# EAGLE board PP-Rev1 (EAGLE 7.1.0)
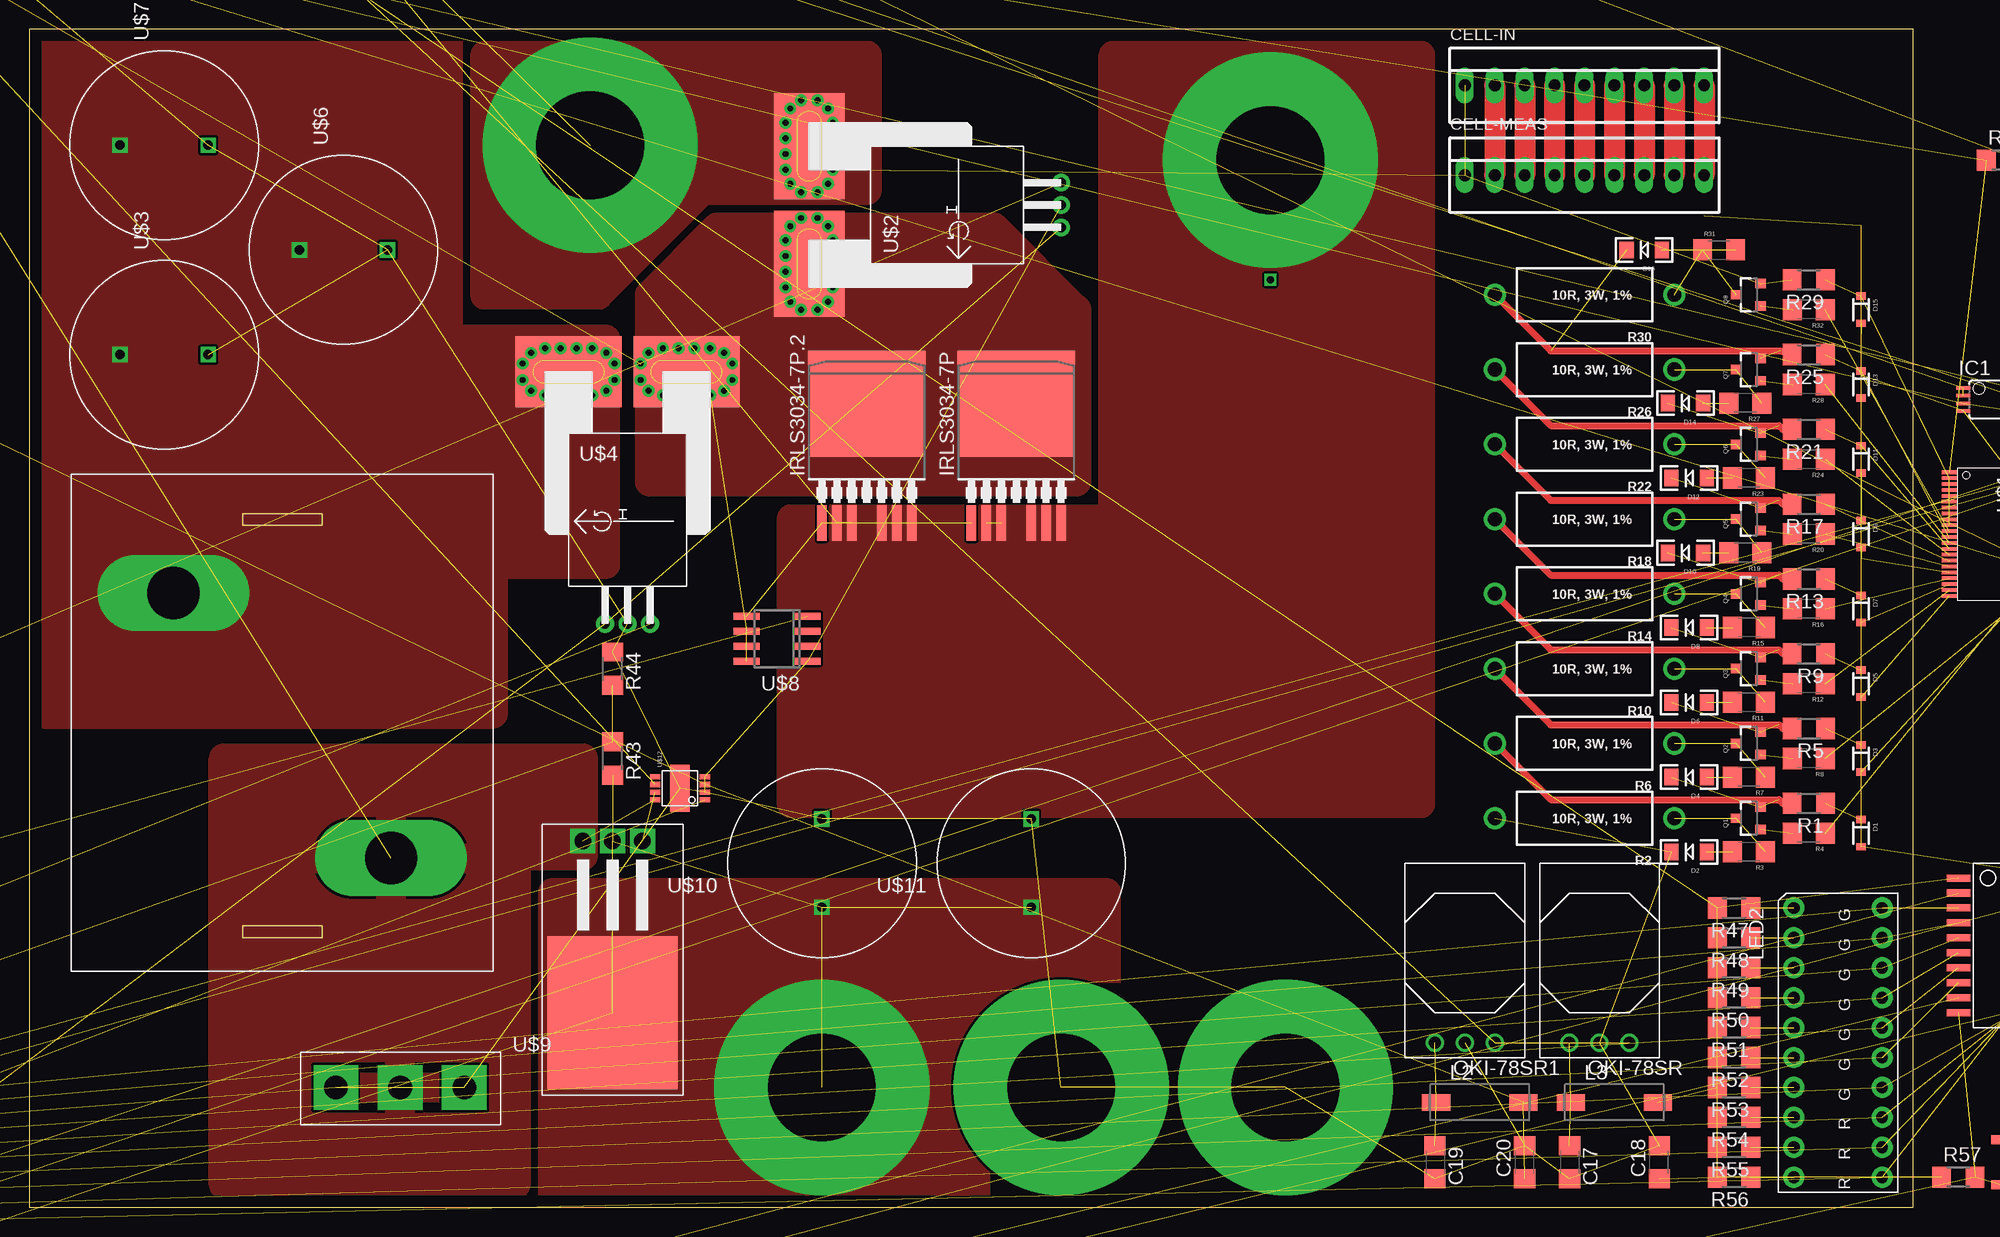
[diagram p0: board, top side]
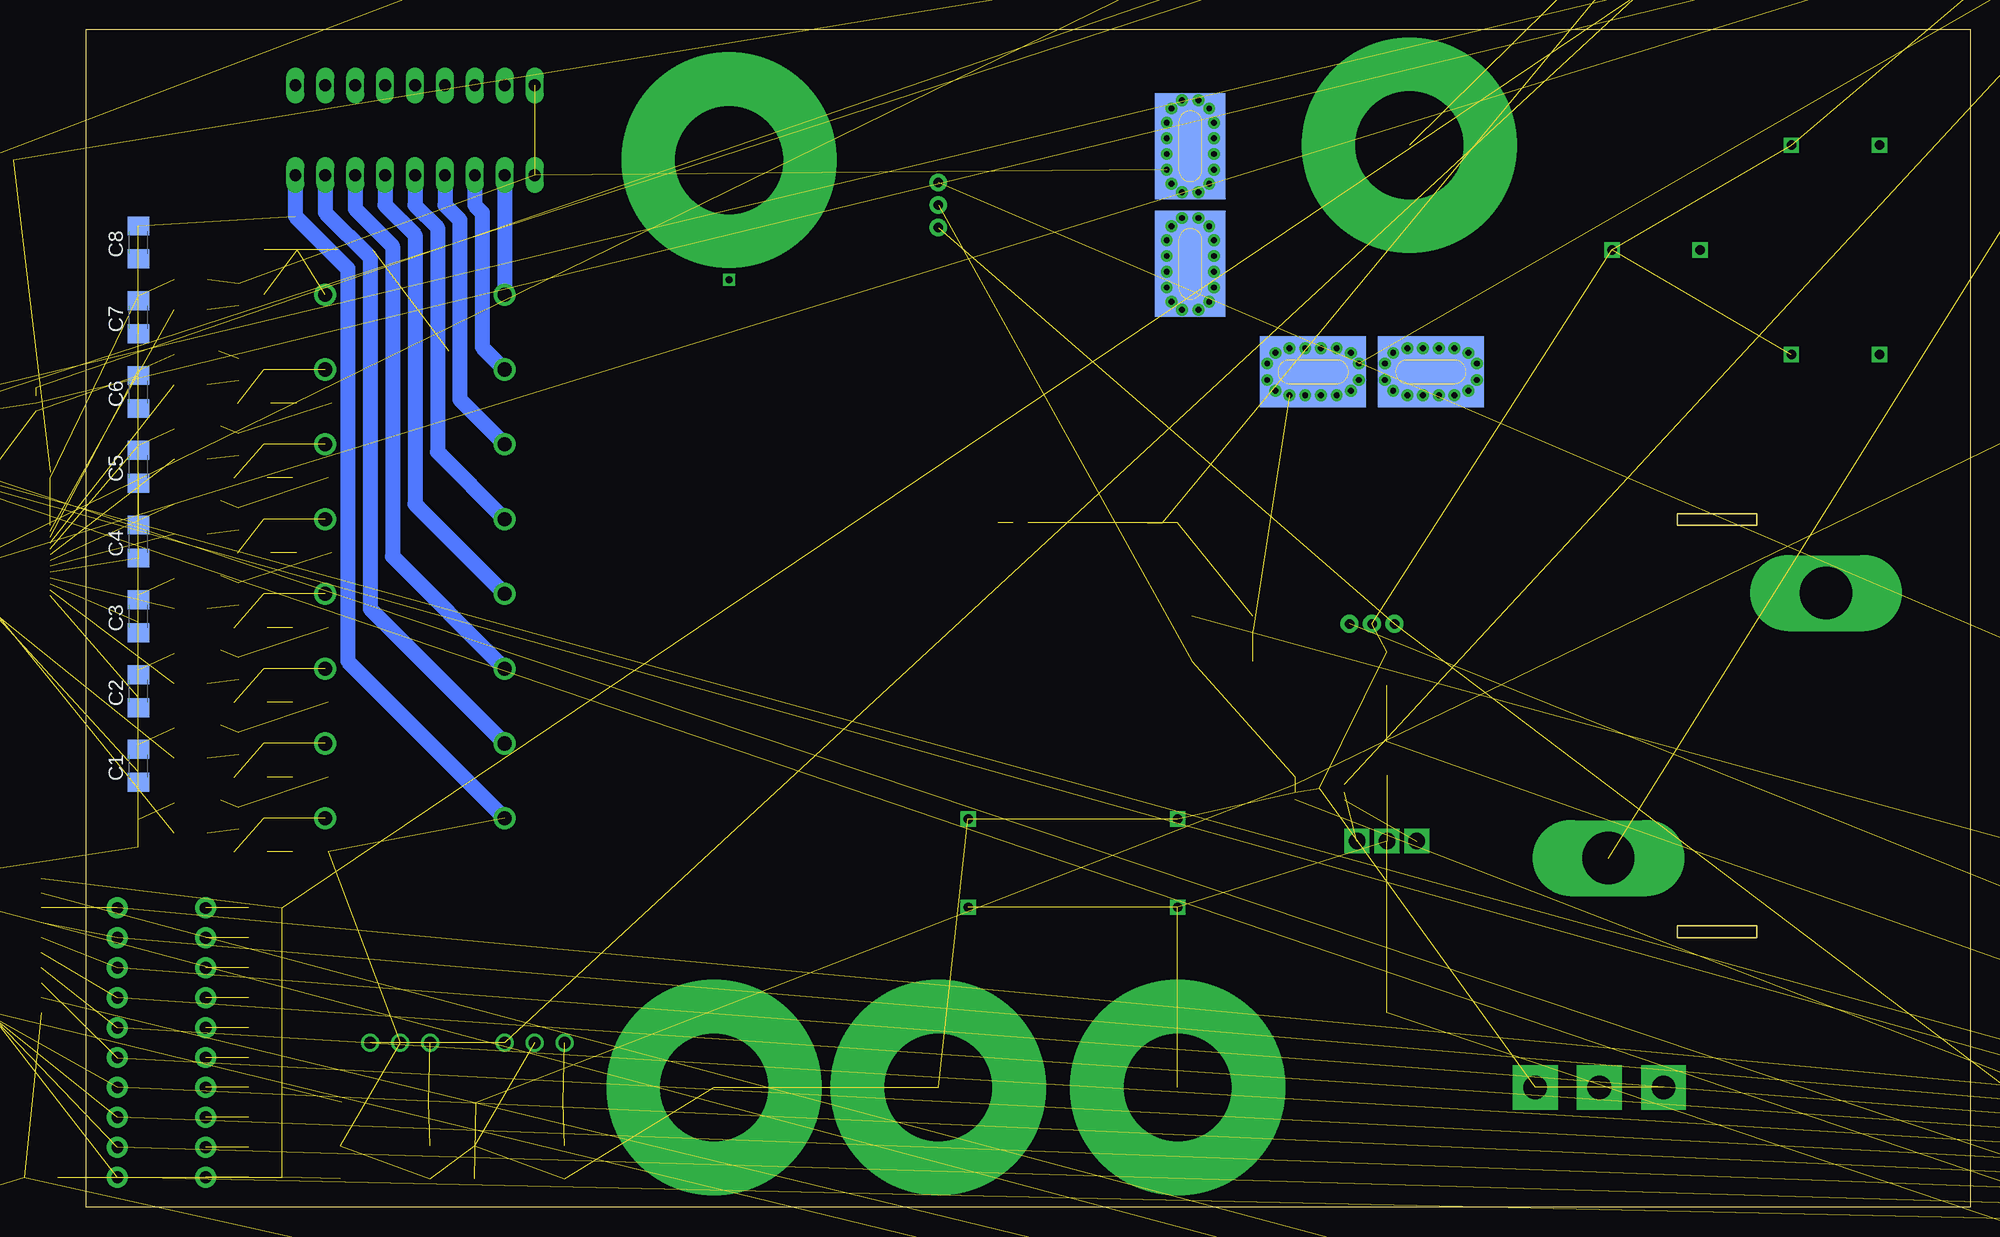
[diagram p1: board, bottom side, seen from below]

Size 160 x 100 mm. Coordinates in mm from the lower left corner, seen from the top.
Outline: 0,0 160,0 160,100 0,100 0,0
Copper layers (1*16): Top 0.035mm / dielectric 1.5mm / Bottom 0.035mm
Design rules "default": minimum track width 10mil, minimum drill 24mil, track to track 8mil, track to pad 8mil, pad to pad 8mil, via to via 8mil, smd to smd 8mil, copper to edge 40mil, drill to drill 8mil, minimum pad ring 10mil, minimum via ring 8mil, stop-mask expansion 4mil, vias tented up to drill 0mil, thermal gap 10mil

## Footprints (pad centres in the part's own frame; a part is rotated, then mirrored left to right if it is on the bottom)
BUZZER-CCV = smd 3.2 x 2.5: + 4,0; - -4,0 | hole 0.8: -3.9,-2.25; 2.25,3.9
C1206 = smd 1.6 x 1.8: 1 -1.4,0; 2 1.4,0
22-23-2091 = drill 1 long: 1 -10.16,0; 2 -7.62,0; 3 -5.08,0; 4 -2.54,0; 5 0,0; 6 2.54,0; 7 5.08,0; 8 7.62,0; 9 10.16,0
LARGE_TERMINAL_HOLE = drill 9.144 pad 18.288: P$1 0,0
SOD-323 = smd 0.63 x 0.83: A 1.15,0; C -1.15,0
LED-1206 = smd 1.2 x 1.4: A -1.5,0; C 1.5,0
SOD-123 = smd 0.9 x 0.95: A 1.575,0; C -1.575,0
SOT23 = smd 1 x 1.4: 1 -0.95,-1.1; 2 0.95,-1.1; 3 0,1.1
PTC-1206 = smd 1 x 1.8: 1 -1.4,0; 2 1.4,0
1X10 = drill 1.016 pad 1.88: 1 0,0; 2 2.54,0; 3 5.08,0; 4 7.62,0; 5 10.16,0; 6 12.7,0; 7 15.24,0; 8 17.78,0; 9 20.32,0; 10 22.86,0
MOLEX-1X2 = drill 1.016 pad 1.88 square: 1 0,0 | drill 1.016 pad 1.88: 2 2.54,0
MSOP08 = smd 0.3 x 1.2: 1 -0.976,-2.113; 2 -0.326,-2.113; 3 0.324,-2.113; 4 0.974,-2.113; 5 0.974,2.112; 6 0.324,2.112; 7 -0.326,2.112; 8 -0.976,2.112
SOIC-20 = smd 0.6 x 2: P$1 0,0; P$2 1.27,0; P$3 2.54,0; P$4 3.81,0; P$5 5.08,0; P$6 6.35,0; P$7 7.62,0; P$8 8.89,0; P$9 10.16,0; P$10 11.43,0; P$11 11.43,9.4; P$12 10.16,9.4; P$13 8.89,9.4; P$14 7.62,9.4; P$15 6.35,9.4; P$16 5.08,9.4; P$17 3.81,9.4; P$18 2.54,9.4; P$19 1.27,9.4; P$20 0,9.4
D2PAK-7 = smd 0.8 x 3: 1 -3.81,-9.207; 2 -2.54,-9.207; 3 -1.27,-9.207; 4 1.27,-9.207; 5 2.54,-9.207; 6 3.81,-9.207 | smd 10 x 9: PAD 0,0.895
MOLEX-1X6 = drill 1.016 pad 1.88 square: 1 0,0 | drill 1.016 pad 1.88: 2 2.54,0; 3 5.08,0; 4 7.62,0; 5 10.16,0; 6 12.7,0
1X16_LONGPADS = drill 1.118 pad 1.88 long: 1 0,0; 2 2.54,0; 3 5.08,0; 4 7.62,0; 5 10.16,0; 6 12.7,0; 7 15.24,0; 8 17.78,0; 9 20.32,0; 10 22.86,0; 11 25.4,0; 12 27.94,0; 13 30.48,0; 14 33.02,0; 15 35.56,0; 16 38.1,0
1210 = smd 1.2 x 2: 1 -1.6,0; 2 1.6,0
L8530M = smd 2.4 x 1.4: 1 -3.7,0; 2 3.7,0
LED-10 = drill 1 pad 1.778: P$1 0,0; P$2 2.54,0; P$3 5.08,0; P$4 7.62,0; P$5 10.16,0; P$6 12.7,0; P$7 15.24,0; P$8 17.78,0; P$9 20.32,0; P$10 22.86,0; P$11 22.86,7.5; P$12 20.32,7.5; P$13 17.78,7.5; P$14 15.24,7.5; P$15 12.7,7.5; P$16 10.16,7.5; P$17 7.62,7.5; P$18 5.08,7.5; P$19 2.54,7.5; P$20 0,7.5
OKI-78SRH = drill 1.016: 1 2.54,0; 2 0,0; 3 -2.54,0
SOT23-3 = smd 0.8 x 0.9: 1 -0.95,-1; 2 0.95,-1; 3 0,1.1
TO-220-FLAT = drill 1.4 square: 1 -2.54,-14.57; 2 0,-14.57; 3 2.54,-14.57 | smd 11 x 13: 4 0,0
SOT323 = smd 0.7 x 0.7: 1 -0.65,-0.925; 2 0.65,-0.925; 3 0,0.925
R1206 = smd 1.6 x 1.803: 1 -1.422,0; 2 1.422,0
AXIAL-0.6 = drill 1.2 pad 1.88: P$1 -7.62,0; P$2 7.62,0
1206 = smd 1.6 x 1.8: 1 -1.4,0; 2 1.4,0
TRIM_POT = drill 1 pad 1.88: 1 5.08,0; 2 0,2.54; 3 0,-2.54
SWITCH-SPDT = drill 1.016 pad 1.88: 1 0,2.54; 2 0,0; 3 0,-2.54
TACTILE-SWITCH-SMD = smd 1.524 x 0.762: 1 -2.794,1.905; 2 2.794,1.905; 3 -2.794,-1.905; 4 2.794,-1.905
22-23-2021 = drill 1 long: 1 -1.27,0; 2 1.27,0
SSOP44 = smd 0.3 x 1.25: 1 -5.25,-3.3; 2 -4.75,-3.3; 3 -4.25,-3.3; 4 -3.75,-3.3; 5 -3.25,-3.3; 6 -2.75,-3.3; 7 -2.25,-3.3; 8 -1.75,-3.3; 9 -1.25,-3.3; 10 -0.75,-3.3; 11 -0.25,-3.3; 12 0.25,-3.3; 13 0.75,-3.3; 14 1.25,-3.3; 15 1.75,-3.3; 16 2.25,-3.3; 17 2.75,-3.3; 18 3.25,-3.3; 19 3.75,-3.3; 20 4.25,-3.3; 21 4.75,-3.3; 22 5.25,-3.3; 23 5.25,3.3; 24 4.75,3.3; 25 4.25,3.3; 26 3.75,3.3; 27 3.25,3.3; 28 2.75,3.3; 29 2.25,3.3; 30 1.75,3.3; 31 1.25,3.3; 32 0.75,3.3; 33 0.25,3.3; 34 -0.25,3.3; 35 -0.75,3.3; 36 -1.25,3.3; 37 -1.75,3.3; 38 -2.25,3.3; 39 -2.75,3.3; 40 -3.25,3.3; 41 -3.75,3.3; 42 -4.25,3.3; 43 -4.75,3.3; 44 -5.25,3.3
PFF_LEADFORM = drill 0.8 pad 1.5: 1 -1.91,0; 2 0,0; 3 1.91,0 | drill 0.5: 4_1 3,23.4; 4_2 4.33,23.4; 4_3 5.67,23.4; 4_4 7,23.4; 4_5 8.2,23; 4_6 8.9,22.1; 4_7 8.9,20.7; 4_8 8.2,19.8; 4_9 7,19.4; 4_10 5.67,19.4; 4_11 4.33,19.4; 4_12 3,19.4; 4_13 1.8,19.8; 4_14 1.1,20.7; 4_15 1.1,22.1; 4_16 1.8,23; 5_1 -7,23.4; 5_2 -5.67,23.4; 5_3 -4.33,23.4; 5_4 -3,23.4; 5_5 -1.8,23; 5_6 -1.1,22.1; 5_7 -1.1,20.7; 5_8 -1.8,19.8; 5_9 -3,19.4; 5_10 -4.33,19.4; 5_11 -5.67,19.4; 5_12 -7,19.4; 5_13 -8.2,19.8; 5_14 -8.9,20.7; 5_15 -8.9,22.1; 5_16 -8.2,23 | smd 9 x 6 bottom: 4_B 5,21.4; 5_B -5,21.4 | smd 9 x 6: 4_T 5,21.4; 5_T -5,21.4
C_16MM = drill 0.8 square: + 0,3.75; GND 0,-3.75
AGP4233 = drill 4.45 pad 6.452 long: P$1 27.15,10.1; P$2 8.65,32.6
SO8 = smd 0.6 x 2.2: 1 -1.905,-2.6; 2 -0.635,-2.6; 3 0.635,-2.6; 4 1.905,-2.6; 5 1.905,2.6; 6 0.635,2.6; 7 -0.635,2.6; 8 -1.905,2.6
TO-247-VERT = drill 2 pad 3.81 square: P$1 0,0; P$2 5.45,0; P$3 10.9,0
MS8E = smd 0.442 x 0.889: P$1 -0.975,-2.106; P$2 -0.325,-2.106; P$3 0.325,-2.106; P$4 0.975,-2.106; P$5 0.975,2.106; P$6 0.325,2.106; P$7 -0.325,2.106; P$8 -0.975,2.106 | smd 4 x 1.68: P$9 0,0
MSP432P401R-LAUNCHPAD = drill 0.9: 1.5 7.62,30.48; 1.6 53.34,33.02; 1.7 53.34,30.48; 2.3 50.8,30.48; 2.4 50.8,40.64; 2.5 53.34,43.18; 2.6 50.8,43.18; 3.0 53.34,40.64; 3.2 7.62,40.64; 3.3 7.62,38.1; 3.5 50.8,25.4; 3.6 53.34,22.86; 3.7 50.8,22.86; 4.0 10.16,38.1; 4.1 7.62,35.56; 4.2 10.16,35.56; 4.3 7.62,33.02; 4.4 10.16,33.02; 4.5 10.16,30.48; 4.6 7.62,27.94; 4.7 10.16,27.94; 5.0 53.34,27.94; 5.1 50.8,27.94; 5.2 53.34,25.4; 5.4 10.16,25.4; 5.5 10.16,22.86; 5.6 50.8,38.1; 5.7 53.34,38.1; 6.0 7.62,43.18; 6.1 10.16,40.64; 6.4 7.62,22.86; 6.5 7.62,25.4; 6.6 50.8,35.56; 6.7 50.8,33.02; GND_1 10.16,43.18; GND_3 7.62,17.78; GND_4 53.34,17.78; GND_5 7.62,15.24; GND_6 53.34,15.24; RST 53.34,35.56 | drill 0.9 square: 2.7 50.8,45.72; 3V3_1 7.62,45.72; 3V3_2 53.34,12.7; 5V_1 10.16,45.72; 5V_2 7.62,12.7; 6.2 20.32,5.08; 8.0 33.02,5.08; 8.5 7.62,5.08; 8.6 7.62,2.54; 9.3 20.32,2.54; 9.7 33.02,2.54; 10.4 45.72,5.08; 10.5 45.72,2.54; GND_2 53.34,45.72 | drill 0.9 octagon: 3V3_3 50.8,5.08; 3V3_4 50.8,2.54; 5.3 17.78,2.54; 5V_3 48.26,5.08; 5V_4 48.26,2.54; 6.3 22.86,2.54; 7.0 27.94,2.54; 7.1 25.4,5.08; 7.2 25.4,2.54; 7.3 22.86,5.08; 7.4 35.56,5.08; 7.5 35.56,2.54; 7.6 38.1,5.08; 7.7 38.1,2.54; 8.2 15.24,5.08; 8.3 15.24,2.54; 8.4 12.7,5.08; 8.7 10.16,2.54; 9.0 10.16,5.08; 9.1 12.7,2.54; 9.2 17.78,5.08; 9.4 27.94,5.08; 9.5 30.48,2.54; 9.6 30.48,5.08; 10.0 40.64,5.08; 10.1 40.64,2.54; 10.2 43.18,5.08; 10.3 43.18,2.54; GND_7 53.34,5.08; GND_8 53.34,2.54
RJ45-8 = drill 1 pad 1.88 square: 1 -4.445,6.35 | drill 1 pad 1.88: 2 -3.175,8.89; 3 -1.905,6.35; 4 -0.635,8.89; 5 0.635,6.35; 6 1.905,8.89; 7 3.175,6.35; 8 4.445,8.89 | hole 3.2: -5.715,0; 5.715,0
MAX3070E = smd 0.49 x 1.3: A -1.905,2.857; B -0.635,2.857; DI 0.635,-2.857; GND 1.905,-2.857; RO -0.635,-2.857; VCC -1.905,-2.857; Y 1.905,2.857; Z 0.635,2.857
22-23-2031 = drill 1 long: 1 -2.54,0; 2 0,0; 3 2.54,0

## Placement (x,y rotation side)
BUZZER_1  BUZZERSMD2  [BUZZER-CCV]  -76.2,105.41 0 top  (outside the outline)
BUZZER_2  BUZZERSMD2  [BUZZER-CCV]  -87.63,105.41 0 top  (outside the outline)
C1  100nF  [C1206]  155.57,37.47 90 bottom
C2  100nF  [C1206]  155.57,43.81 90 bottom
C3  100nF  [C1206]  155.57,50.16 90 bottom
C4  100nF  [C1206]  155.57,56.52 90 bottom
C5  100nF  [C1206]  155.57,62.87 90 bottom
C6  100nF  [C1206]  155.57,69.22 90 bottom
C7  100nF  [C1206]  155.57,75.56 90 bottom
C8  100nF  [C1206]  155.57,81.92 90 bottom
C9  1uF  [C1206]  -123.19,139.7 0 top  (outside the outline)
C10  1uF  [C1206]  -128.27,139.7 0 top  (outside the outline)
C11  10nF  [C1206]  -105.41,139.7 0 top  (outside the outline)
C12  10nF  [C1206]  -111.76,139.7 0 top  (outside the outline)
C13  100nF  [C1206]  -104.14,133.35 0 top  (outside the outline)
C14  10uF  [C1206]  -118.11,139.7 0 top  (outside the outline)
C15  0.22uF  [C1206]  -35.56,133.35 0 top  (outside the outline)
C16  1uF  [C1206]  -133.35,139.7 0 top  (outside the outline)
C17  47µF  [C1206]  130.81,3.81 270 top
C18  47µF  [C1206]  138.43,3.81 90 top
C19  47µF  [C1206]  119.38,3.81 270 top
C20  47µF  [C1206]  127,3.81 90 top
C21  0.1uF  [C1206]  -34.29,146.05 0 top  (outside the outline)
C22  1uF  [C1206]  -251.46,-179.07 0 top  (outside the outline)
CELL-IN  22-23-2091  [22-23-2091]  132.08,95.25 0 top
CELL-MEAS  22-23-2091  [22-23-2091]  132.08,87.63 0 top
CHARGER+  TERMINAL_HOLE  [LARGE_TERMINAL_HOLE]  67.31,10.16 0 top
CHARGER-  TERMINAL_HOLE  [LARGE_TERMINAL_HOLE]  87.63,10.16 0 top
D1  PDZ7.5B  [SOD-323]  155.57,31.75 270 top
D2  [LED-1206]  140.97,30.16 180 top
D3  PDZ7.5B  [SOD-323]  155.57,38.1 270 top
D4  [LED-1206]  140.97,36.51 180 top
D5  PDZ7.5B  [SOD-323]  155.57,44.45 270 top
D6  [LED-1206]  140.97,42.86 180 top
D7  PDZ7.5B  [SOD-323]  155.57,50.8 270 top
D8  [LED-1206]  140.97,49.21 180 top
D9  PDZ7.5B  [SOD-323]  155.57,57.15 270 top
D10  [LED-1206]  140.65,55.56 180 top
D11  PDZ7.5B  [SOD-323]  155.57,63.5 270 top
D12  [LED-1206]  140.97,61.91 180 top
D13  PDZ7.5B  [SOD-323]  155.57,69.85 270 top
D14  [LED-1206]  140.65,68.26 180 top
D15  PDZ7.5B  [SOD-323]  155.57,76.2 270 top
D16  [LED-1206]  137.16,81.28 180 top
D17  BAT46W  [SOD-123]  -60.96,157.48 0 top  (outside the outline)
D18  BAT46W  [SOD-123]  -66.04,157.48 0 top  (outside the outline)
D19  MMSZ5267B  [SOD-123]  -55.88,157.48 0 top  (outside the outline)
D20  BAS21  [SOT23]  -104.14,115.57 0 top  (outside the outline)
F1  PTCSMD  [PTC-1206]  -26.67,152.4 0 top  (outside the outline)
GAGUE_S  M10"  [1X10]  -189.23,-12.7 0 top  (outside the outline)
GAUGE_ON  M02POLAR  [MOLEX-1X2]  -196.85,-77.47 0 top  (outside the outline)
IC1  LT6004  [MSOP08]  166.37,68.58 270 top  (outside the outline)
IC2  TLC6C5912-Q1  [SOIC-20]  163.83,27.94 270 top  (outside the outline)
IRLS3034-7P  [D2PAK-7]  83.82,67.31 0 top
IRLS3034-7P.2  [D2PAK-7]  71.12,67.31 0 top
JP1  M10"  [1X10]  -189.23,-5.08 0 top  (outside the outline)
JP2  M02POLAR  [MOLEX-1X2]  -116.84,146.05 0 top  (outside the outline)
JP3  M02POLAR  [MOLEX-1X2]  -125.73,147.32 0 top  (outside the outline)
JP4  JST B6B-XH  [MOLEX-1X6]  -257.81,-85.09 0 top  (outside the outline)
JP5  [1X16_LONGPADS]  -257.81,-92.71 0 top  (outside the outline)
L1  BLM31PG330SN1L  [1210]  -22.86,161.29 0 top  (outside the outline)
L2  Fair-Rite 2773019447  [L8530M]  123.19,8.89 0 top
L3  Fair-Rite 2773019447  [L8530M]  134.62,8.89 0 top
LED1  [LED-1206]  -15.24,161.29 0 top  (outside the outline)
LED2  LED-DC7G3HWA  [LED-10]  149.86,25.4 270 top
OKI-78SR  Q_OKI-78SR5  [OKI-78SRH]  133.35,13.97 0 top
OKI-78SR1  Q_OKI-78SR12  [OKI-78SRH]  121.92,13.97 0 top
Q1  MOSFET-PCHANNEL  [SOT23-3]  146.05,33.02 90 top
Q2  MOSFET-PCHANNEL  [SOT23-3]  146.05,39.37 90 top
Q3  MOSFET-PCHANNEL  [SOT23-3]  146.05,45.72 90 top
Q4  MOSFET-PCHANNEL  [SOT23-3]  146.05,52.07 90 top
Q5  MOSFET-PCHANNEL  [SOT23-3]  146.05,58.42 90 top
Q6  MOSFET-PCHANNEL  [SOT23-3]  146.05,64.77 90 top
Q7  MOSFET-PCHANNEL  [SOT23-3]  146.05,71.12 90 top
Q8  MOSFET-PCHANNEL  [SOT23-3]  146.05,77.47 90 top
Q9  CSD18532  [TO-220-FLAT]  49.53,16.51 180 top
Q10  2N7002PW  [SOT323]  -91.44,151.13 0 top  (outside the outline)
Q11  2N7002PW  [SOT323]  -95.25,151.13 0 top  (outside the outline)
Q12  2N7002PW  [SOT323]  -179.07,1.27 0 top  (outside the outline)
Q13  2N7002PW  [SOT323]  -182.88,1.27 0 top  (outside the outline)
Q14  2N7002PW  [SOT323]  -186.69,1.27 0 top  (outside the outline)
Q15  2N7002PW  [SOT323]  -190.5,1.27 0 top  (outside the outline)
R1  100R  [R1206]  151.13,34.29 180 top
R2  10R, 3W, 1%  [AXIAL-0.6]  132.08,33.02 180 top
R3  450R  [1206]  146.05,30.16 180 top
R4  3.3k  [1206]  151.13,31.75 180 top
R5  100R  [R1206]  151.13,40.64 180 top
R6  10R, 3W, 1%  [AXIAL-0.6]  132.08,39.37 180 top
R7  450R  [1206]  146.05,36.51 180 top
R8  3.3k  [1206]  151.13,38.1 180 top
R9  100R  [R1206]  151.13,46.99 180 top
R10  10R, 3W, 1%  [AXIAL-0.6]  132.08,45.72 180 top
R11  450R  [1206]  146.05,42.86 180 top
R12  3.3k  [1206]  151.13,44.45 180 top
R13  100R  [R1206]  151.13,53.34 180 top
R14  10R, 3W, 1%  [AXIAL-0.6]  132.08,52.07 180 top
R15  450R  [1206]  146.05,49.21 180 top
R16  3.3k  [1206]  151.13,50.8 180 top
R17  100R  [R1206]  151.13,59.69 180 top
R18  10R, 3W, 1%  [AXIAL-0.6]  132.08,58.42 180 top
R19  450R  [1206]  145.73,55.56 180 top
R20  3.3k  [1206]  151.13,57.15 180 top
R21  100R  [R1206]  151.13,66.04 180 top
R22  10R, 3W, 1%  [AXIAL-0.6]  132.08,64.77 180 top
R23  450R  [1206]  146.05,61.91 180 top
R24  3.3k  [1206]  151.13,63.5 180 top
R25  100R  [R1206]  151.13,72.39 180 top
R26  10R, 3W, 1%  [AXIAL-0.6]  132.08,71.12 180 top
R27  450R  [1206]  145.73,68.26 180 top
R28  3.3k  [1206]  151.13,69.85 180 top
R29  100R  [R1206]  151.13,78.74 180 top
R30  10R, 3W, 1%  [AXIAL-0.6]  132.08,77.47 180 top
R31  450R  [1206]  143.51,81.28 0 top
R32  3.3k  [1206]  151.13,76.2 180 top
R33  10k, 1%  [R1206]  -19.05,133.35 0 top  (outside the outline)
R34  1k  [R1206]  -138.43,139.7 0 top  (outside the outline)
R35  10k, 1%  [R1206]  -27.94,133.35 0 top  (outside the outline)
R36  1k  [R1206]  -15.24,146.05 0 top  (outside the outline)
R37  100R  [R1206]  167.64,88.9 0 top  (outside the outline)
R38  60kΩ  [R1206]  -66.04,146.05 0 top  (outside the outline)
R39  10kΩ  [R1206]  -72.39,146.05 0 top  (outside the outline)
R40  5kΩ  [R1206]  -109.22,146.05 0 top  (outside the outline)
R41  60kΩ  [R1206]  -78.74,146.05 0 top  (outside the outline)
R42  10kΩ  [R1206]  -85.09,146.05 0 top  (outside the outline)
R43  100kΩ  [R1206]  49.53,38.1 270 top
R44  10kΩ  [R1206]  49.53,45.72 270 top
R45  10kΩ  [R1206]  -97.79,146.05 0 top  (outside the outline)
R46  10kΩ  [R1206]  -104.14,146.05 0 top  (outside the outline)
R47  200R  [R1206]  144.78,25.4 180 top
R48  200R  [R1206]  144.78,22.86 180 top
R49  200R  [R1206]  144.78,20.32 180 top
R50  200R  [R1206]  144.78,17.78 180 top
R51  200R  [R1206]  144.78,15.24 180 top
R52  200R  [R1206]  144.78,12.7 180 top
R53  200R  [R1206]  144.78,10.16 180 top
R54  200R  [R1206]  144.78,7.62 180 top
R55  200R  [R1206]  144.78,5.08 180 top
R56  200R  [R1206]  144.78,2.54 180 top
R57  10k  [R1206]  163.83,2.54 0 top
R58  200R  [R1206]  -189.23,-20.32 0 top  (outside the outline)
R59  200R  [R1206]  -189.23,-26.67 0 top  (outside the outline)
R60  200R  [R1206]  -189.23,-33.02 0 top  (outside the outline)
R61  200R  [R1206]  -189.23,-39.37 0 top  (outside the outline)
R62  200R  [R1206]  -189.23,-45.72 0 top  (outside the outline)
R63  200R  [R1206]  -189.23,-52.07 0 top  (outside the outline)
R64  200R  [R1206]  -189.23,-58.42 0 top  (outside the outline)
R65  200R  [R1206]  -189.23,-64.77 0 top  (outside the outline)
R66  200R  [R1206]  -189.23,-71.12 0 top  (outside the outline)
R67  200R  [R1206]  -189.23,-77.47 0 top  (outside the outline)
R68  1k  [R1206]  -256.54,-132.08 0 top  (outside the outline)
R69  1M  [R1206]  -256.54,-138.43 0 top  (outside the outline)
R70  1M  [R1206]  -256.54,-144.78 0 top  (outside the outline)
R71  1M  [R1206]  -256.54,-151.13 0 top  (outside the outline)
R72  120 Ohm  [1206]  -246.38,-177.8 0 top  (outside the outline)
R73  120 Ohm  [1206]  -241.3,-177.8 0 top  (outside the outline)
RV1  [TRIM_POT]  -257.81,-99.06 0 top  (outside the outline)
S1  [SWITCH-SPDT]  -111.76,87.63 0 top  (outside the outline)
S2  SWITCH-MOMENTARY-2SMD  [TACTILE-SWITCH-SMD]  170.18,3.81 0 top  (outside the outline)
THERM_1  22-23-2021  [22-23-2021]  -19.05,118.11 0 top  (outside the outline)
THERM_2  22-23-2021  [22-23-2021]  -27.94,118.11 0 top  (outside the outline)
U$1  Q_LTC6802-2  [SSOP44]  166.37,57.15 270 top  (outside the outline)
U$2  ACS770  [PFF_LEADFORM]  87.63,85.09 90 top
U$3  C_108CKH050M  [C_16MM]  11.43,72.39 90 top
U$4  ACS770  [PFF_LEADFORM]  50.8,49.53 0 top
U$5  AGP4233-223ME  [AGP4233]  39.37,62.23 180 top
U$6  C_108CKH050M  [C_16MM]  26.67,81.28 90 top
U$7  C_108CKH050M  [C_16MM]  11.43,90.17 90 top
U$8  LT1910  [SO8]  63.5,48.26 90 top
U$9  D-STTH60P03SW  [TO-247-VERT]  26.04,10.16 0 top
U$10  C_108CKH050M  [C_16MM]  67.31,29.21 180 top
U$11  C_108CKH050M  [C_16MM]  85.09,29.21 180 top
U$12  LTC4440  [MS8E]  55.24,35.56 90 top
U$13  MSP432P401R-LAUNCHPAD  [MSP432P401R-LAUNCHPAD]  -259.08,-80.01 0 top  (outside the outline)
U$14  RJ45-8PTH  [RJ45-8]  -251.46,-165.1 0 top  (outside the outline)
U$15  MAX3077  [MAX3070E]  -256.54,-180.34 0 top  (outside the outline)
V_ARRAY  TERMINAL_HOLE  [LARGE_TERMINAL_HOLE]  47.62,90.17 0 top
V_OUT  TERMINAL_HOLE  [LARGE_TERMINAL_HOLE]  105.41,88.9 0 top
V_OUT1  TERMINAL_HOLE  [LARGE_TERMINAL_HOLE]  106.68,10.16 0 top
X1  22-23-2031  [22-23-2031]  -146.05,5.08 0 top  (outside the outline)
X2  22-23-2031  [22-23-2031]  -154.94,5.08 0 top  (outside the outline)
X3  22-23-2031  [22-23-2031]  -163.83,5.08 0 top  (outside the outline)
X4  22-23-2031  [22-23-2031]  -172.72,5.08 0 top  (outside the outline)

## Library data of the parts
BUZZER_1 BUZZER_2 RV1 S1 = SparkFun-Electromechanical
C1-C16 L2 L3 R1 R5 R9 R13 R17 R21 R25 R29 R33-R37 R47-R71 = rcl
C17-C22 R38-R46 = resistor
CELL-IN CELL-MEAS = con-molex; MF: MOLEX; MPN: 22-23-2091; OC_FARNELL: 1756827; OC_NEWARK: 56H0450
CHARGER+ CHARGER- OKI-78SR OKI-78SR1 U$3 U$6-U$8 U$10 U$11 V_ARRAY V_OUT V_OUT1 = MRDT-2015-PowerBoard
D1 D3 D5 D7 D9 D11 D13 D15 = SparkFun-DiscreteSemi; PROD_ID: DIO-12442; VALUE: 5.6V
D2 D4 D6 D8 D10 D12 D14 D16 LED1 = SparkFun-LED
D17-D19 = SparkFun-DiscreteSemi; PROD_ID: DIO-12440; VALUE: 16V
D20 = diode
F1 = SparkFun-PowerIC; PROD_ID: RES-11150
GAGUE_S GAUGE_ON JP1-JP5 U$14 = SparkFun-Connectors
IC1 = linear
IC2 LED2 U$5 U$9 U$12 U$13 = 2016PowerPackLibraries
IRLS3034-7P IRLS3034-7P.2 U$1 U$2 U$4 = MRDT-2015-BMS
L1 R72 R73 = SparkFun-Passives
Q1-Q8 = SparkFun-DiscreteSemi; PROD_ID: TRANS-08285
Q9 = PCB0M1
Q10-Q15 = SparkFun-DiscreteSemi; PROD_ID: TRANS-11151
R2-R4 R6-R8 R10-R12 R14-R16 R18-R20 R22-R24 R26-R28 R30-R32 = SparkFun-Resistors
S2 = SparkFun-Electromechanical; PROD_ID: SWCH-08247
THERM_1 THERM_2 = con-molex; MF: MOLEX; MPN: 22-23-2021; OC_FARNELL: 1462926; OC_NEWARK: 25C3832
U$15 = MAX3077
X1-X4 = con-molex; MF: MOLEX; MPN: 22-23-2031; OC_FARNELL: 1462950; OC_NEWARK: 30C0862

## Nets
5V: BUZZER_1.+ BUZZER_2.- C18.1 C21.1 IC2.P$1 JP5.2 L3.2 R45.2 R46.2 R47.2 R48.2 R49.2 R50.2 R51.2 R52.2 R53.2 R54.2 R55.2 R56.2 R57.1 R58.1 R59.1 R60.1 R61.1 R62.1 R63.1 R64.1 R65.1 R66.1 R67.1 RV1.3 U$13.5V_1 U$13.5V_2 U$13.5V_3 U$13.5V_4
+3V3: R68.2 U$13.3V3_1 U$13.3V3_2 U$13.3V3_3 U$13.3V3_4
+5V: C22.1 U$2.1 U$4.1 U$15.VCC
+12V: C16.1 C20.1 D20.1 L2.2 U$12.P$3 X1.2 X2.2 X3.2 X4.2
BMS_CSBI: R69.2 U$1.44 U$13.6.2
BMS_MISO: R68.1 U$1.43 U$13.6.5
BMS_MOSI: R70.2 U$1.42 U$13.6.4
BMS_SCLK: R71.2 U$1.41 U$13.6.3
BMS_VREF: C10.1 IC1.3 IC1.5 U$1.30
BMS_VREG: C9.1 IC1.8 R69.1 R70.1 R71.1 U$1.31
BUZZ_1: Q11.1 U$13.5.6
BUZZ_2: Q10.1 U$13.5.7
CELL_1: CELL-IN.8 CELL-MEAS.8 D4.C Q1.2 R1.2 R6.P$2
CELL_1_BAL: R4.1 U$1.25
CELL_1_FILTER: C1.1 D1.C D3.A R1.1 U$1.24
CELL_2: CELL-IN.7 CELL-MEAS.7 D6.C Q2.2 R5.2 R10.P$2
CELL_2_BAL: R8.1 U$1.23
CELL_2_FILTER: C2.1 D3.C D5.A R5.1 U$1.22
CELL_3: CELL-IN.6 CELL-MEAS.6 D8.C Q3.2 R9.2 R14.P$2
CELL_3_BAL: R12.1 U$1.21
CELL_3_FILTER: C3.1 D5.C D7.A R9.1 U$1.20
CELL_4: CELL-IN.5 CELL-MEAS.5 D10.C Q4.2 R13.2 R18.P$2
CELL_4_BAL: R16.1 U$1.19
CELL_4_FILTER: C4.1 D7.C D9.A R13.1 U$1.18
CELL_5: CELL-IN.4 CELL-MEAS.4 D12.C Q5.2 R17.2 R22.P$2
CELL_5_BAL: R20.1 U$1.17
CELL_5_FILTER: C5.1 D9.C D11.A R17.1 U$1.16
CELL_6: CELL-IN.3 CELL-MEAS.3 D14.C Q6.2 R21.2 R26.P$2
CELL_6_BAL: R24.1 U$1.15
CELL_6_FILTER: C6.1 D11.C D13.A R21.1 U$1.14
CELL_7: CELL-IN.2 CELL-MEAS.2 D16.C Q7.2 R25.2 R30.P$2
CELL_7_BAL: R28.1 U$1.13
CELL_7_FILTER: C7.1 D13.C D15.A R25.1 U$1.12
CELL_8: CELL-IN.1 CELL-MEAS.1 L1.1 Q8.2 R29.2 U$2.4_1 U$2.4_2 U$2.4_3 U$2.4_4 U$2.4_5 U$2.4_6 U$2.4_7 U$2.4_8 U$2.4_9 U$2.4_10 U$2.4_11 U$2.4_12 U$2.4_13 U$2.4_14 U$2.4_15 U$2.4_16 U$2.4_B U$2.4_T V_ARRAY.P$1
CELL_8_BAL: R32.1 U$1.11
CELL_8_FILTER: C8.1 D15.C R29.1 U$1.2 U$1.4 U$1.6 U$1.8 U$1.10
CHARGER+: CHARGER+.P$1 JP4.4 Q9.2 Q9.4 R43.2 U$10.+ U$11.+
CHARGER_CTL: U$12.P$1 U$13.8.0
CHARGER_I_MEAS: U$4.3 U$13.5.2
ESTOP_1: JP3.2 R45.1 U$13.1.5
ESTOP_2: JP2.2 R46.1 U$13.1.6
FAN_CTL_1: Q12.1 U$13.2.4
FAN_CTL_2: Q13.1 U$13.2.5
FAN_CTL_3: Q14.1 U$13.2.6
FAN_CTL_4: Q15.1 U$13.2.7
FAN_TACH_1: U$13.5.0 X1.3
FAN_TACH_2: U$13.3.3 X2.3
FAN_TACH_3: U$13.3.2 X3.3
FAN_TACH_4: U$13.3.0 X4.3
GAUGE_D: IC2.P$6 JP1.7 LED2.P$17
GAUGE_ON: GAUGE_ON.2 IC2.P$10 R57.2 S2.3 U$13.6.6
GND: C1.2 C2.2 C3.2 C4.2 C5.2 C6.2 C7.2 C8.2 C9.2 C10.2 C11.2 C12.2 C13.2 C14.2 C16.2 C17.2 C18.2 C19.2 C20.2 C21.2 C22.2 CELL-IN.9 CELL-MEAS.9 CHARGER-.P$1 D1.A D2.C D17.A D18.A D19.A GAUGE_ON.1 IC1.4 IC2.P$20 JP2.1 JP3.1 JP4.2 JP4.3 JP4.5 JP5.1 OKI-78SR1.2 OKI-78SR.2 Q10.2 Q11.2 Q12.2 Q13.2 Q14.2 Q15.2 R2.P$2 R39.2 R40.2 R42.1 R44.1 RV1.2 S1.3 S2.1 THERM_1.2 THERM_2.2 U$1.26 U$1.32 U$1.35 U$1.36 U$1.37 U$1.38 U$1.39 U$1.40 U$2.2 U$3.GND U$4.2 U$6.GND U$7.GND U$8.1 U$9.P$1 U$9.P$3 U$10.GND U$11.GND U$12.P$2 U$12.P$4 U$12.P$9 U$13.GND_1 U$13.GND_2 U$13.GND_3 U$13.GND_4 U$13.GND_5 U$13.GND_6 U$13.GND_7 U$13.GND_8 U$14.7 U$14.8 U$15.GND V_OUT1.P$1
LCD_DB[0]: JP5.7 U$13.4.0
LCD_DB[1]: JP5.8 U$13.4.1
LCD_DB[2]: JP5.9 U$13.4.2
LCD_DB[3]: JP5.10 U$13.4.3
LCD_DB[4]: JP5.11 U$13.4.4
LCD_DB[5]: JP5.12 U$13.4.5
LCD_DB[6]: JP5.13 U$13.4.6
LCD_DB[7]: JP5.14 U$13.4.7
LCD_EN: JP5.6 U$13.3.7
LCD_RS: JP5.4 U$13.3.5
LCD_RW: JP5.5 U$13.3.6
LCD_VBACK: JP5.3 RV1.1
LED_CLR: IC2.P$9 U$13.10.0
LED_RCK: IC2.P$12 U$13.10.1
LED_SER_IN: IC2.P$2 U$13.10.2
LED_SRCK: IC2.P$19 U$13.10.3
LOGIC_POWER: F1.2 OKI-78SR1.1 OKI-78SR.1
N$1: Q3.3 R10.P$1 R11.1
N$2: Q1.3 R2.P$1 R3.1
N$3: D2.A R3.2
N$4: D6.A R11.2
N$5: Q1.1 R4.2
N$6: Q3.1 R12.2
N$7: Q2.3 R6.P$1 R7.1
N$8: D4.A R7.2
N$9: Q2.1 R8.2
N$10: Q4.3 R14.P$1 R15.1
N$11: D8.A R15.2
N$12: Q4.1 R16.2
N$13: Q5.3 R18.P$1 R19.1
N$14: D10.A R19.2
N$15: Q5.1 R20.2
N$16: Q6.3 R22.P$1 R23.1
N$17: D12.A R23.2
N$18: Q6.1 R24.2
N$19: Q7.3 R26.P$1 R27.1
N$20: D14.A R27.2
N$21: Q7.1 R28.2
N$22: Q8.3 R30.P$1 R31.1
N$23: D16.A R31.2
N$24: Q8.1 R32.2
N$25: IC1.1 IC1.2 R33.1
N$26: D17.C D18.C D19.C L1.2 R37.2
N$27: IC1.6 IC1.7 R35.1
N$28: U$3.+ U$4.5_1 U$4.5_2 U$4.5_3 U$4.5_4 U$4.5_5 U$4.5_6 U$4.5_7 U$4.5_8 U$4.5_9 U$4.5_10 U$4.5_11 U$4.5_12 U$4.5_13 U$4.5_14 U$4.5_15 U$4.5_16 U$4.5_B U$4.5_T U$5.P$1 U$6.+ U$7.+
N$29: R33.2 R34.2 THERM_1.1
N$30: R35.2 R36.2 THERM_2.1
N$31: C13.1 R37.1 U$1.1
N$32: IC2.P$3 JP1.10 LED2.P$20
N$33: C19.1 L2.1 OKI-78SR1.3
N$34: IRLS3034-7P.1 IRLS3034-7P.2.1 U$8.5
N$35: R73.2 U$14.1 U$15.Y
N$36: LED1.C R40.1
N$37: IRLS3034-7P.2 IRLS3034-7P.2.2 IRLS3034-7P.2.3 IRLS3034-7P.2.4 IRLS3034-7P.2.5 IRLS3034-7P.2.6 IRLS3034-7P.3 IRLS3034-7P.4 IRLS3034-7P.5 IRLS3034-7P.6 LED1.A R38.1 V_OUT.P$1
N$38: C15.1 D20.3 U$12.P$6
N$39: C15.2 Q9.3 U$5.P$2 U$9.P$2 U$12.P$8
N$40: Q9.1 U$12.P$7
N$41: C14.1 IRLS3034-7P.2.PAD IRLS3034-7P.PAD R41.2 S1.1 U$2.5_1 U$2.5_2 U$2.5_3 U$2.5_4 U$2.5_5 U$2.5_6 U$2.5_7 U$2.5_8 U$2.5_9 U$2.5_10 U$2.5_11 U$2.5_12 U$2.5_13 U$2.5_14 U$2.5_15 U$2.5_16 U$2.5_B U$2.5_T U$4.4_1 U$4.4_2 U$4.4_3 U$4.4_4 U$4.4_5 U$4.4_6 U$4.4_7 U$4.4_8 U$4.4_9 U$4.4_10 U$4.4_11 U$4.4_12 U$4.4_13 U$4.4_14 U$4.4_15 U$4.4_16 U$4.4_B U$4.4_T U$8.6 U$8.8
N$42: F1.1 S1.2
N$43: IC2.P$4 JP1.9 LED2.P$19
N$44: IC2.P$5 JP1.8 LED2.P$18
N$45: R73.1 U$14.2 U$15.Z
N$46: IC2.P$7 JP1.6 LED2.P$16
N$47: IC2.P$8 JP1.5 LED2.P$15
N$48: IC2.P$13 JP1.4 LED2.P$14
N$49: IC2.P$14 JP1.3 LED2.P$13
N$50: IC2.P$15 JP1.2 LED2.P$12
N$51: IC2.P$16 JP1.1 LED2.P$11
N$52: LED2.P$1 R47.1
N$53: LED2.P$2 R48.1
N$54: LED2.P$3 R49.1
N$55: LED2.P$4 R50.1
N$56: LED2.P$5 R51.1
N$57: LED2.P$6 R52.1
N$58: LED2.P$7 R53.1
N$59: LED2.P$8 R54.1
N$60: LED2.P$9 R55.1
N$61: LED2.P$10 R56.1
N$62: R72.2 U$14.6 U$15.B
N$63: BUZZER_1.- Q11.3
N$64: BUZZER_2.+ Q10.3
N$66: Q12.3 X1.1
N$67: R72.1 U$14.3 U$15.A
N$70: Q13.3 X2.1
N$71: Q14.3 X3.1
N$72: Q15.3 X4.1
N$75: GAGUE_S.1 R58.2
N$76: GAGUE_S.2 R59.2
N$77: GAGUE_S.3 R60.2
N$78: GAGUE_S.4 R61.2
N$79: GAGUE_S.5 R62.2
N$80: GAGUE_S.6 R63.2
N$81: GAGUE_S.7 R64.2
N$82: GAGUE_S.8 R65.2
N$83: GAGUE_S.9 R66.2
N$84: GAGUE_S.10 R67.2
N$100: C17.1 L3.1 OKI-78SR.3
N$115: JP5.15
N$116: JP5.16
PACK_GATE: U$8.4 U$13.6.0
PACK_I_MEAS: U$2.3 U$13.5.5
SER_IN: U$13.9.6 U$15.RO
SER_OUT: U$13.9.7 U$15.DI
SUPPLY_CTL: JP4.6 U$13.2.3
SUPPLY_DC_OK: JP4.1 U$13.1.7
TEMP_1: C11.1 R34.1 U$1.28
TEMP_2: C12.1 R36.1 U$1.29
V_CHECK_ARRAY: R41.1 R42.2 U$13.5.3
V_CHECK_CHARGER_IN: R43.1 R44.2 U$13.5.1
V_CHECK_OUT: R38.2 R39.1 U$13.5.4

## Tracks (layer width: path | path; a pad name or v marks a point on that pad's centre or on a via)
5V  (34 unrouted)
+3V3  (4 unrouted)
+5V  (3 unrouted)
+12V  (8 unrouted)
BMS_CSBI  (2 unrouted)
BMS_MISO  (2 unrouted)
BMS_MOSI  (2 unrouted)
BMS_SCLK  (2 unrouted)
BMS_VREF  (3 unrouted)
BMS_VREG  (5 unrouted)
BUZZ_1  (1 unrouted)
BUZZ_2  (1 unrouted)
CELL_1  (2 unrouted)
  Top 0.61: R6.P$2 129.22,34.61 148.59,34.61 148.91,34.29 R1.2
  Top 1.778: CELL-IN.8 CELL-MEAS.8
  Bottom 1.27: CELL-MEAS.8 139.7,84.45 135.89,80.64 135.89,50.8 R6.P$2
CELL_1_BAL  (1 unrouted)
CELL_1_FILTER  (4 unrouted)
CELL_2  (2 unrouted)
  Top 0.61: R10.P$2 129.22,40.96 148.59,40.96 148.91,40.64 R5.2
  Top 1.778: CELL-IN.7 CELL-MEAS.7
  Bottom 1.27: CELL-MEAS.7 137.16,84.77 133.99,81.6 133.99,55.24 R10.P$2
CELL_2_BAL  (1 unrouted)
CELL_2_FILTER  (4 unrouted)
CELL_3  (2 unrouted)
  Top 0.61: R14.P$2 129.22,47.31 148.59,47.31 148.91,46.99 R9.2
  Top 1.778: CELL-IN.6 CELL-MEAS.6
  Bottom 1.27: CELL-MEAS.6 134.62,85.09 132.08,82.55 132.08,59.69 R14.P$2
CELL_3_BAL  (1 unrouted)
CELL_3_FILTER  (4 unrouted)
CELL_4  (2 unrouted)
  Top 0.61: R18.P$2 129.22,53.66 148.59,53.66 148.91,53.34 R13.2
  Top 1.778: CELL-IN.5 CELL-MEAS.5
  Bottom 1.27: CELL-MEAS.5 132.08,85.09 130.18,83.19 130.18,64.14 R18.P$2
CELL_4_BAL  (1 unrouted)
CELL_4_FILTER  (4 unrouted)
CELL_5  (2 unrouted)
  Top 0.61: R22.P$2 129.22,60.01 148.59,60.01 148.91,59.69 R17.2
  Top 1.778: CELL-IN.4 CELL-MEAS.4
  Bottom 1.27: CELL-MEAS.4 129.54,85.09 128.27,83.82 128.27,68.58 R22.P$2
CELL_5_BAL  (1 unrouted)
CELL_5_FILTER  (4 unrouted)
CELL_6  (2 unrouted)
  Top 0.61: R26.P$2 129.22,66.36 148.59,66.36 148.91,66.04 R21.2
  Top 1.778: CELL-IN.3 CELL-MEAS.3
  Bottom 1.27: CELL-MEAS.3 127,85.09 126.36,84.45 126.36,73.03 R26.P$2
CELL_6_BAL  (1 unrouted)
CELL_6_FILTER  (4 unrouted)
CELL_7  (2 unrouted)
  Top 0.61: R30.P$2 129.22,72.71 148.76,72.71 R25.2
  Top 1.778: CELL-IN.2 CELL-MEAS.2
  Bottom 1.27: CELL-MEAS.2 R30.P$2
CELL_7_BAL  (1 unrouted)
CELL_7_FILTER  (4 unrouted)
CELL_8  (5 unrouted)
  pour Top (no thermals): 71.12,91.44 71.12,86.36 60.96,86.36 57.15,86.36 48.26,77.47 39.37,77.47 38.73,77.47 38.73,97.16 38.73,97.79 67.31,97.79 71.12,97.79
CELL_8_BAL  (1 unrouted)
CELL_8_FILTER  (7 unrouted)
CHARGER+  (6 unrouted)
  pour Top (no thermals): 91.44,0 91.44,26.67 44.45,26.67 44.45,0
CHARGER_CTL  (1 unrouted)
CHARGER_I_MEAS  (1 unrouted)
ESTOP_1  (2 unrouted)
ESTOP_2  (2 unrouted)
FAN_CTL_1  (1 unrouted)
FAN_CTL_2  (1 unrouted)
FAN_CTL_3  (1 unrouted)
FAN_CTL_4  (1 unrouted)
FAN_TACH_1  (1 unrouted)
FAN_TACH_2  (1 unrouted)
FAN_TACH_3  (1 unrouted)
FAN_TACH_4  (1 unrouted)
GAUGE_D  (2 unrouted)
GAUGE_ON  (4 unrouted)
GND  (86 unrouted)
  Top 1.778: CELL-IN.9 CELL-MEAS.9
  Bottom 1.27: CELL-MEAS.9 142.24,84.14 137.79,79.69 137.79,46.35 R2.P$2
LCD_DB[0]  (1 unrouted)
LCD_DB[1]  (1 unrouted)
LCD_DB[2]  (1 unrouted)
LCD_DB[3]  (1 unrouted)
LCD_DB[4]  (1 unrouted)
LCD_DB[5]  (1 unrouted)
LCD_DB[6]  (1 unrouted)
LCD_DB[7]  (1 unrouted)
LCD_EN  (1 unrouted)
LCD_RS  (1 unrouted)
LCD_RW  (1 unrouted)
LCD_VBACK  (1 unrouted)
LED_CLR  (1 unrouted)
LED_RCK  (1 unrouted)
LED_SER_IN  (1 unrouted)
LED_SRCK  (1 unrouted)
LOGIC_POWER  (2 unrouted)
N$1  (2 unrouted)
N$2  (2 unrouted)
N$3  (1 unrouted)
N$4  (1 unrouted)
N$5  (1 unrouted)
N$6  (1 unrouted)
N$7  (2 unrouted)
N$8  (1 unrouted)
N$9  (1 unrouted)
N$10  (2 unrouted)
N$11  (1 unrouted)
N$12  (1 unrouted)
N$13  (2 unrouted)
N$14  (1 unrouted)
N$15  (1 unrouted)
N$16  (2 unrouted)
N$17  (1 unrouted)
N$18  (1 unrouted)
N$19  (2 unrouted)
N$20  (1 unrouted)
N$21  (1 unrouted)
N$22  (2 unrouted)
N$23  (1 unrouted)
N$24  (1 unrouted)
N$25  (2 unrouted)
N$26  (4 unrouted)
N$27  (2 unrouted)
N$28
  pour Top (no thermals): 8.89,41.91 39.37,41.91 39.37,54.61 48.9,54.61 48.9,73.66 35.56,73.66 35.56,99.06 1.27,99.06 1.27,41.91
N$29  (2 unrouted)
N$30  (2 unrouted)
N$31  (2 unrouted)
N$32  (2 unrouted)
N$33  (2 unrouted)
N$34  (2 unrouted)
N$35  (2 unrouted)
N$36  (1 unrouted)
N$37  (4 unrouted)
  pour Top (no thermals): 68.58,58.42 92.08,58.42 92.08,97.79 118.11,97.79 118.11,58.42 118.11,34.29 64.77,34.29 64.77,58.42
N$38  (2 unrouted)
N$39  (2 unrouted)
  pour Top: 46.99,31.75 46.99,29.84 41.27,29.84 41.27,23.5 41.27,1.91 16.51,1.91 16.51,38.1 46.99,38.1
N$40  (1 unrouted)
N$41  (5 unrouted)
  pour Top (no thermals): 69.85,61.59 52.7,61.59 52.7,71.75 52.7,77.47 58.42,83.19 81.92,83.19 88.9,76.2 88.9,64.77 88.9,61.59
N$42  (1 unrouted)
N$43  (2 unrouted)
N$44  (2 unrouted)
N$45  (2 unrouted)
N$46  (2 unrouted)
N$47  (2 unrouted)
N$48  (2 unrouted)
N$49  (2 unrouted)
N$50  (2 unrouted)
N$51  (2 unrouted)
N$52  (1 unrouted)
N$53  (1 unrouted)
N$54  (1 unrouted)
N$55  (1 unrouted)
N$56  (1 unrouted)
N$57  (1 unrouted)
N$58  (1 unrouted)
N$59  (1 unrouted)
N$60  (1 unrouted)
N$61  (1 unrouted)
N$62  (2 unrouted)
N$63  (1 unrouted)
N$64  (1 unrouted)
N$65  (via drill 0.6)
  other vias: 105.41,78.74
N$66  (1 unrouted)
N$67  (2 unrouted)
N$70  (1 unrouted)
N$71  (1 unrouted)
N$72  (1 unrouted)
N$75  (1 unrouted)
N$76  (1 unrouted)
N$77  (1 unrouted)
N$78  (1 unrouted)
N$79  (1 unrouted)
N$80  (1 unrouted)
N$81  (1 unrouted)
N$82  (1 unrouted)
N$83  (1 unrouted)
N$84  (1 unrouted)
N$100  (2 unrouted)
PACK_GATE  (1 unrouted)
PACK_I_MEAS  (1 unrouted)
SER_IN  (1 unrouted)
SER_OUT  (1 unrouted)
SUPPLY_CTL  (1 unrouted)
SUPPLY_DC_OK  (1 unrouted)
TEMP_1  (2 unrouted)
TEMP_2  (2 unrouted)
V_CHECK_ARRAY  (2 unrouted)
V_CHECK_CHARGER_IN  (2 unrouted)
V_CHECK_OUT  (2 unrouted)